# Altium PCB rNET_POE_Sensor_RevA1.PCBDOC (part 3 of 3)
Units mil, origin at the board's own origin, x right, y up, seen from the top; angles counter-clockwise.
Board outline 3750 x 2245 mil, 6 copper layers (TopLayer, Mid Layer 1, Mid Layer 2, Mid Layer 3, Mid Layer 4, BottomLayer), stack 60.4 mil thick; 269 components, 206 nets, 1048 pads, 579 vias.
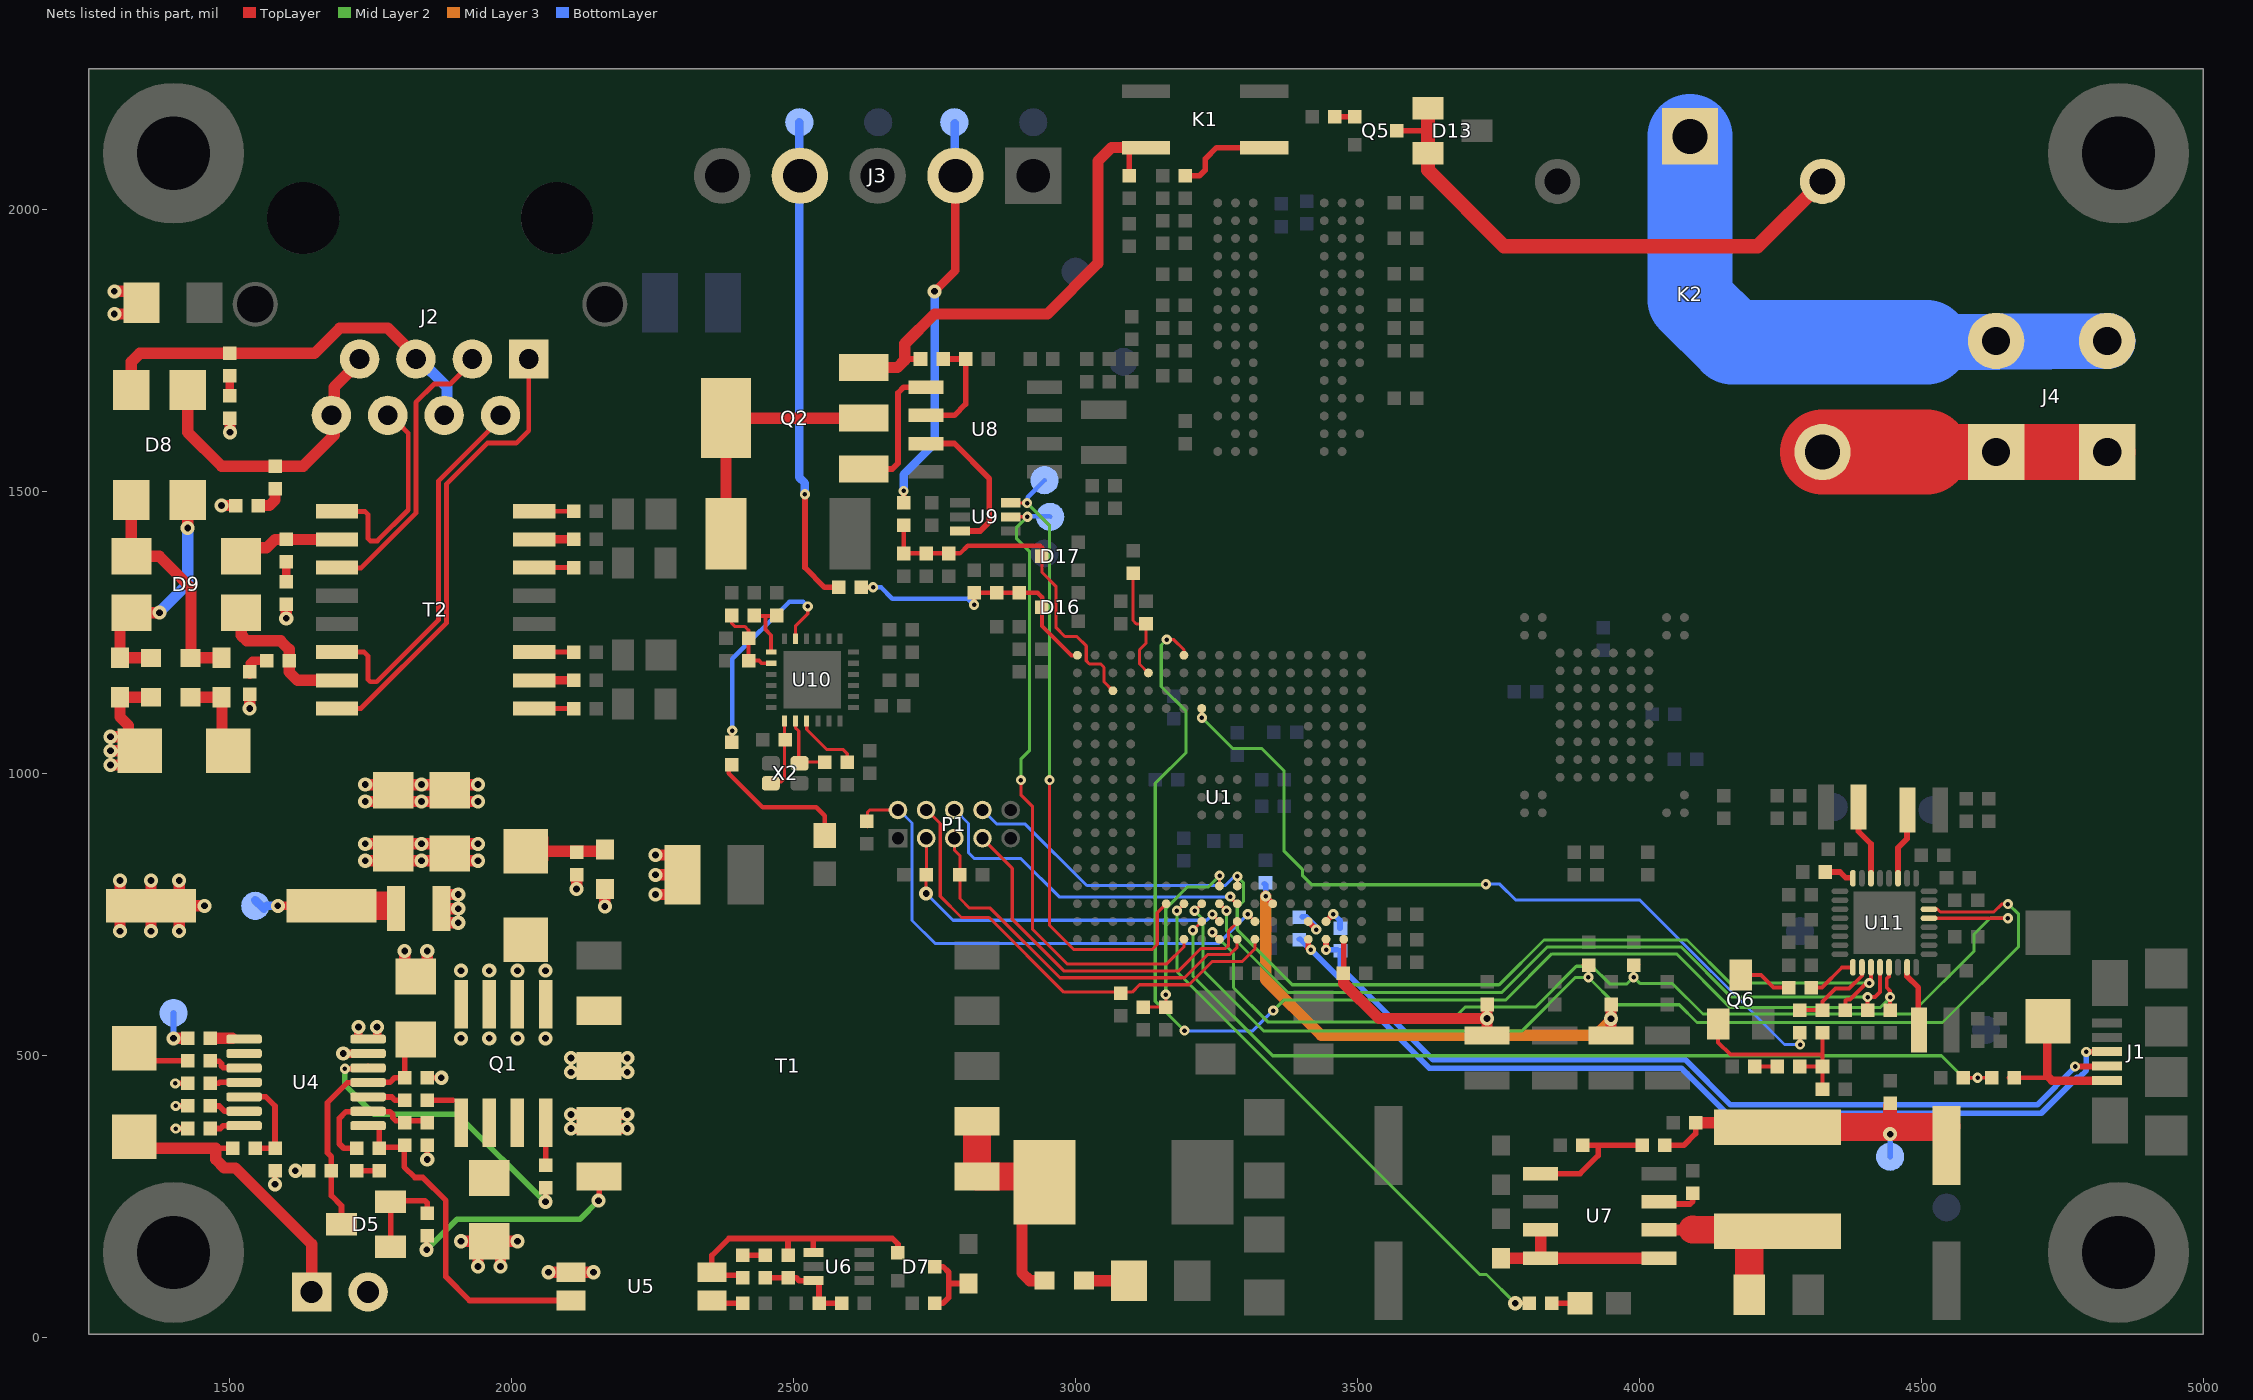
[diagram p7: the nets of this part, all layers, seen from the top]

## Via types
v1: diameter 25, hole 12, TopLayer to BottomLayer, 212 vias
v2: diameter 18, hole 8, TopLayer to BottomLayer, tented top, 187 vias
v3: diameter 18, hole 8, TopLayer to BottomLayer, 171 vias
v4: diameter 18, hole 8, TopLayer to BottomLayer, tented both sides, 7 vias
v5: diameter 25, hole 12, TopLayer to BottomLayer, tented top, 2 vias

## Nets (pads, with @x,y where several pads share a name; then routed paths per layer and width w, separated by ;. In a path a pad name is that pad's centre, name@x,y a point inside that pad or via, vN(x,y) a via of type N, cw(c..) or ccw(c..) an arc to the next point about the centre after c; other vN are vias at no path point) (continued)
NetC34_2: C34.2 C35.2 L4.1 U1.U16 | length 406.6
  TopLayer w10: C35.2@3475.74,644.74 U1.U16@3475.74,705.66
  TopLayer w20: C35.2@3475.8,643 3475.8,627.4 3538.2,565 v1(3730,565) ; L4.1@3730,540 v1(3730,565) ; C34.2@3730,590 v1(3730,565)
NetC36_2: C36.2 C37.2 L5.1 U1.R12 | length 910.1
  TopLayer w10: v2(3337.5,781.9) 3337.5,780.9 U1.R12@3349.75,768.65
  TopLayer w20: L5.1@3950,535 v1(3950,564.7) C36.2@3950,589.6
  Mid Layer 3 w20: v2@3337.3,781.8 3337.3,633.9 3435.6,535.6 3923.1,535.6 v1@3950.9,563.4
  BottomLayer w10: C37.2@3335.2,804.4 3337.4,802.2 3337.4,782 v2(3337.5,781.9)
NetC50_1: C50.1 D2.1 T1.9 T1.10 | length 362
  TopLayer w20: D2.1@2908,231 2905,228 2905,114 2919,100 C50.1@2930,100
  TopLayer w50: T1.9@2825,383 T1.10@2825,285 D2.1@2940,285
NetC50_2: C50.2 R18.1 | length 65
  TopLayer w20: C50.2@3015,100 R18.1@3080,100
NetC51_1: C51.1 D3.2 R19.1 | length 220.3
  TopLayer w20: D3.2@2025,855 D3.2@2032,862 ; D3.2@2025,862 D3.2@2032,862 ; D3.2@2055,847 D3.2@2055,862 ; R19.1@2164,860 2162,862 D3.2@2055,862 ; D3.2@2032,862 2055,885 D3.2@2055,862 ; D3.2@2032,862 D3.2@2055,862
NetC51_2: C51.2 C52.2 C53.2 L6.1 R19.2 T1.3 | length 548.6
  TopLayer w20: v1(1740,845) 1770,845 C53.2@1785,860 ; v1(1740,875) C53.2@1778,875 ; C53.2@1808,875 v1(1840,875) C52.2@1860,875 ; C53.2@1820,845 v1(1840,845) C52.2@1860,845 ; C52.2@1875,870 C52.2@1875,865 ; L6.1@1880,735 v1(1905,735) ; L6.1@1880,785 v1(1905,785) ; L6.1@1885,760 v1(1905,760) ; C52.2@1915,845 v1(1940,845) ; v1(1940,875) C52.2@1860,875 ; v1@2115,793 v1(2115,795) C51.2@2115,820 ; v1@2165,765 R19.2@2165,795 ; C52.2@1860,875 C52.2@1870,865 ; C52.2@1870,865 1865,860 C52.2@1875,860 ; C52.2@1870,865 C52.2@1875,860 ; C52.2@1870,865 C52.2@1875,865 ; C52.2@1875,860 1915,860 1910,865 C52.2@1875,865 ; C52.2@1875,860 C52.2@1875,865
  other v1: 2105,470 2205,470 2105,495 2205,495 2165,764
NetC55_2: C55.2 C75.2 L10.1 R43.1 R79.2 TP13.1 | length 511.3
  TopLayer w10: R43.1@4045,340 4079,340 4100,361 C55.2@4100,380
  TopLayer w20: C55.2@4100,380 L10.1@4153,380
  TopLayer w25: 4445,375 R79.2@4445,410
  TopLayer w50: L10.1@4245,372.5 4543.5,372.5 C75.2@4545,374
  BottomLayer w10: TP13.1@4445,320 v1(4445,360)
NetC58_2: C58.2 C59.2 C107.2 D5.3 U4.4 | length 448.2
  TopLayer w10: D5.3@1698,200 1698,233 1680,251 1680,320 1673,327 1673,416 1708,451 U4.4@1746,451 ; U4.4@1745,451.8 1783.8,451.8 1792,460 C58.2@1810,460 C59.2@1810,526
NetC60_1: C60.1 C69.1 R28.2 R40.1 U6.3 | length 174.1
  TopLayer w10: C69.1@2450,105 C60.1@2490,105 2505,105 2510,100 U6.3@2535,100 2540,100 2545,95 R28.2@2545,60 R40.1@2585,60
NetC60_2: C60.2 D7.1 R37.2 U5.2 U6.1 | length 506.6
  TopLayer w10: U5.2@2355,110 2410,110 R37.2@2410,105 ; U5.2@2355,115 2355,145 2385,175 2490,175 ; C60.2@2490,145 2490,175 ; U6.1@2535,150 2535,175 ; D7.1@2685,150 2685,165 2675,175 2535,175 ; 2490,175 2535,175
NetC61_1: C61.1 R33.2 | length 35
  TopLayer w15: R33.2@1600,1340 C61.1@1600,1375
NetC61_2: C61.2 D9.4 T2.10 | length 163.3
  TopLayer w20: D9.4@1520,1405 1525,1400 1565,1400 1580,1415 T2.10@1675,1415
NetC62_1: C62.1 R34.2 | length 52.1
  TopLayer w15: R34.2@1535,1175 R34.2@1535,1180 1535,1195 1540,1200 C62.1@1565,1200
NetC62_2: C62.2 D9.3 T2.15 | length 251.6
  TopLayer w20: D9.3@1520,1285 1520,1245 1530,1235 1590,1235 1605,1220 1605,1180 1620,1165 T2.15@1675,1165
NetC63_1: C63.1 R35.2 | length 35
  TopLayer w15: R35.2@1500,1670 C63.1@1500,1705
NetC63_2: C63.2 D8.4 J2.4 J2.5 | length 720.5
  TopLayer w20: D8.4@1325,1685 1325,1730 1340,1745 1650,1745 1695,1790 1780,1790 J2.5@1823,1747
  BottomLayer w20: J2.5@1835,1735 1885,1685 1885,1635 J2.4@1875,1625
NetC64_1: C64.1 R36.2 | length 54.1
  TopLayer w20: R36.2@1550,1475 1570,1475 1580,1485 C64.1@1580,1505
NetC64_2: C64.2 D8.3 J2.7 J2.8 | length 538.3
  TopLayer w20: D8.3@1425,1680 1425,1605 1485,1545 1630,1545 1685,1600 1685,1685 J2.7@1735,1735
NetC65_1: C65.1 C67.1 D6.1 L9.1 R32.2 TP15.1 U4.7 | length 361.8
  TopLayer w10: v2@1405,450 R32.2@1425,450
  TopLayer w15: U4.7@1728,532 v1(1728,550) ; U4.7@1761,531 v1(1761,550)
  TopLayer w20: v1(1288,1015) D6.1@1310,1015 ; v1(1288,1040) 1310,1040 D6.1@1315,1035 ; v1(1288,1065) 1308,1065 D6.1@1313,1060 ; L9.1@1304,1134 L9.1@1305,1135 C65.1@1360,1135 ; L9.1@1305,1134 1305,1100 1320,1085 D6.1@1320,1035 ; v1@1403,530 C67.1@1425,530
  BottomLayer w10: v1@1400,532 TP15.1@1400,575
  other v1: 1400,530
  other v2: 1403,450
NetC65_2: C65.2 C66.2 C67.2 D4.2 D6.2 L6.2 L8.1 R25.2 TP14.1 U4.8 U4.9 | length 532.4
  TopLayer w10: D4.2@1330,490 1424,490 R25.2@1425,489
  TopLayer w15: v1(1585,765) 1660,765 1665,760 C66.2@1680,775
  TopLayer w20: C65.2@1430,1135 1465,1135 ; C67.2@1465,530 U4.8@1504,530 ; D6.2@1486,1060 L8.1@1486,1134 ; 1465,1135 1484.95,1134.05 L8.1@1486,1134 ; 1465,1135 L8.1@1485,1135 L8.1@1486,1134
  TopLayer w50: C66.2@1689,765 L6.2@1784,765
  BottomLayer w15: TP14.1@1545,775 1560,760 1565,765 v1(1585,765)
NetC68_1: C68.1 D8.2 D9.2 L9.2 | length 413.4
  TopLayer w20: C68.1@1361,1205 C68.1@1360,1205 L9.2@1305,1205 1305,1265 D9.2@1325,1285 1325,1286 1326,1285 v1(1375,1285) ; v1(1425,1435) D8.2@1425,1480
  BottomLayer w20: v1@1377,1285 v1(1375,1285) 1375,1286 1425,1336 v1(1425,1435)
NetC68_2: C68.2 D8.1 D9.1 L8.2 | length 409
  TopLayer w20: D9.1@1325,1385 D8.1@1325,1485 ; D9.1@1326,1386 1327,1385 1375,1385 1431,1329 C68.2@1431,1205 ; C68.2@1430,1205 C68.2@1431,1205 ; C68.2@1430,1206 C68.2@1431,1205 ; L8.2@1485,1205 C68.2@1431,1205
NetC69_2: C69.2 R37.1 | length 40
  TopLayer w10: R37.1@2410,145 C69.2@2450,145
NetC70_1: C70.1 R39.1 | length 41
  TopLayer w10: R39.1@1724,295 R39.1@1725,295 C70.1@1765,295
NetC70_2: C70.2 R38.1 U4.1 U5.4 | length 619.5
  TopLayer w10: U4.1@1745,375 1764,375 U4.1@1766,373 ; C70.2@1765,335 U4.1@1765,373 ; C70.2@1766,338 1767,337 R38.1@1809,337 ; R38.1@1809,341 R38.1@1809,337 ; R38.1@1810,340 1810,337 R38.1@1809,337 ; U5.4@2105,65 1925,65 1883,107 1883,242 1842,283 1828,283 1809,302 R38.1@1809,337
NetC71_2: C71.2 R38.2 R39.2 U4.2 | length 250.4
  TopLayer w10: R39.2@1725,335 1702,335 1694,343 1694,388 1706,400 1784,400 1789,395 1789,389 1794,384 C71.2@1850,384
NetC72_2: C72.2 D7.3 R26.2 | length 138.3
  TopLayer w10: R26.2@2750,60 2765,60 2775,70 2775,95 ; D7.3@2750,125 2765,125 2775,115 2775,95 ; C72.2@2810,95 2775,95
NetC73_2: C73.2 R33.1 R34.1 R35.1 R36.1 | length 170
  TopLayer w20: v1(1295,1815) C73.2@1340,1815 ; v1(1295,1855) C73.2@1335,1855 ; v1(1485,1475) R36.1@1510,1475 ; v1(1500,1605) R35.1@1500,1625 ; v1(1535,1115) R34.1@1535,1130 ; v1(1600,1275) R33.1@1600,1300
NetC76_2: C76.2 U7.3 | length 67.7
  TopLayer w10: U7.3@4035,240 4039,236 4090,236 4095,241 C76.2@4095,245
NetC78_2: C78.2 C109.2 U10.1 | length 106
  TopLayer w7: C78.2@2430,1276 2433,1279 2466,1279 C109.2@2470,1275 ; 2450,1274 2450,1255 2460,1245 U10.1@2460,1215
NetC82_2: C82.2 T2.7 | length 69
  TopLayer w15: T2.7@2045,1415 C82.2@2114,1415
NetC85_2: C85.2 U11.32 | length 52.1
  TopLayer w10: C85.2@4330,825 4356,825 4366,815 U11.32@4378,815
NetC86_2: C86.2 C110.2 L15.1 U10.2 | length 146.1
  TopLayer w5.5: L15.1@2385,1275 2390,1270 2390,1266.1 2395.4,1260.7 2413.1,1260.7 2420,1253.8 ; C86.2@2420,1197 C86.2@2423.1,1200.1
  TopLayer w7: C86.2@2420,1197 2420,1253.8 ; C86.2@2423.1,1200.1 2438.5,1200.1 2443.3,1195.3 U10.2@2460,1195.3
NetC94_2: C94.2 U10.7 X2.1 | length 142.2
  TopLayer w5.5: X2.1@2449.4,982.3 2452.1,985 2478,985 2484,991 U10.7@2484,1095
NetC95_2: C95.2 U10.8 X2.3 | length 127.8
  TopLayer w5.5: U10.8@2503,1098 2503,1081 2509,1075 2509,1028 2501,1020 C95.2@2545,1020
NetC102_1: C102.1 C103.1 C104.2 Q6.1 R70.1 | length 365.4
  TopLayer w7: Q6.1@4140,555 4140,522.6 4161.7,500.9 4324,500.9 ; C103.1@4285,480 R70.1@4325,480 ; C104.2@4325,440 R70.1@4325,480 ; C102.1@4325,540 R70.1@4325,480
NetC102_2: C102.2 R65.1 U11.10 | length 159.1
  TopLayer w7: R65.1@4285,580 C102.2@4325,580 4325,595 4348,618 4372,618 4395,641 U11.10@4395,656
NetC103_2: C103.2 R64.2 | length 38.7
  TopLayer w7: R64.2@4206.3,480 C103.2@4245,480
NetC108_2: C108.2 T2.2 | length 70
  TopLayer w15: T2.2@2035,1165 T2.2@2040,1165 C108.2@2105,1165
NetD1_1: D1.1 R14.2 | length 50
  TopLayer w10: R14.2@3845,60 D1.1@3895,60
NetD3_1: D3.1 Q1.5 Q1.6 Q1.7 Q1.8 T1.4 | length 5
  TopLayer w20: D3.1@2025,705 D3.1@2025,710
  other v1: 1910,530 1960,530 2010,530 2060,530 1910,650 1960,650 2010,650 2060,650
NetD4_1: D4.1 P2.1 R20.1 | length 527.1
  TopLayer w10: 1475,335 R20.1@1505,335
  TopLayer w20: D4.1@1330,350 1330,335 1475,335 1475,315 1490,300 1510,300 1645,165 P2.1@1645,80
NetD5_1: D5.1 D5.2 R23.2 | length 162.5
  TopLayer w10: D5.1@1787,160 1785,162 D5.2@1785,240 1785,242 1846,242 1850,238 R23.2@1850,225
NetD10_2: D10.2 L10.2 U7.2 | length 315
  TopLayer w20: U7.2@4035,190 4095,190
  TopLayer w50: 4095,191 L10.2@4240,190 ; D10.2@4195,75 L10.2@4195,185
NetD11_1: D11.1 R45.2 | length 246.2
  TopLayer w8: R45.2@2385,1015 2385,999.8 2444.8,940 2540,940 2555,925 D11.1@2555,895
NetD12_1: D12.1 J1.1 R6.2 | length 274.3
  TopLayer w8: R6.2@4655,460 R6.2@4665,460 4723,460
  TopLayer w15: D12.1@4724,560 4724,463 4732,455 J1.1@4830,455
NetD13_1: D13.1 D13.2 K2.2 Q5.3 | length 968.4
  TopLayer w10: Q5.3@3570,2140 3625,2140
  TopLayer w25: D13.2@3625,2100 3625,2070 3760,1935 4210,1935 K2.2@4325,2050 ; D13.1@3625,2180 3625,2140 3625,2110 D13.2@3626.62,2100.27
NetJ1_2: J1.2 R80.1 U1.U15 | length 1556.6
  TopLayer w10: U1.U15@3444.25,705.66 3444.25,687.45 v2(3444.5,687.2) ; v2(4773,480) 4825,480 4826,481 J1.2@4828,479
  BottomLayer w10: v2(3444.5,687.2) R80.1@3464.2,687.2 ; R80.1@3470,685.2 R80.1@3470,685 3469.8,679.9 3469.8,656.2 3634,492 4082,492 4162,412 4706,412 4773,479 v2(4773,480)
NetJ1_3: J1.3 R7.1 U1.U14 | length 1652
  TopLayer w10: v2@3412.4,690 v2@3412.7,689.7 ; U1.U14@3412.7,705 v2@3412.7,689.7 ; v2(3417.6,687.1) 3415.3,687.1 v2@3412.7,689.7 ; v2(4793,506) 4826.2,506 4828.2,508 J1.3@4830,506.2
  BottomLayer w10: R7.1@3397.4,705.9 3398.4,705.9 3417.2,687.1 v2(3417.6,687.1) 3627.7,477 4075,477 4155,397 4713,397 4777,461 4781,461 4793,473 v2(4793,506) 4793.82,506 v2@4795.82,508
NetJ2_1: J2.1 T2.16 | length 826.2
  TopLayer w8.6: T2.16@1676.5,1115 1732.3,1115 1883.9,1266.6 1883.9,1513.2 1956.5,1585.8 2007.8,1585.8 2030,1608 J2.1@2030,1732
NetJ2_2: J2.2 T2.14 | length 694.9
  TopLayer w8.6: T2.14@1675,1215.1 1738,1215.1 1744.7,1208.4 1744.7,1166.7 1749,1162.4 1760.4,1162.4 1870.3,1272.3 1870.3,1518.9 J2.2@1984.3,1632.9
NetJ2_3: J2.3 T2.11 | length 528.6
  TopLayer w8.6: T2.11@1675,1364.4 1732.9,1364.4 1830,1461.5 1830,1658 1862.6,1690.6 1890.6,1690.6 J2.3@1935,1735
NetJ2_6: J2.6 T2.9 | length 371.3
  TopLayer w8.6: T2.9@1674.2,1464.8 1739.4,1464.8 1744.7,1459.5 1744.7,1416.8 1749.2,1412.3 1761.5,1412.3 1816.4,1467.2 1816.4,1603.6 J2.6@1800,1620
NetJ4_1: J4.1 J4.3 K2.4 | length 505
  TopLayer w100: 4510,1570 J4.3@4633,1570 J4.1@4830,1570
  TopLayer w150: K2.4@4325,1570 4510,1570
NetJ4_2: J4.2 J4.4 K2.1 | length 1051.1
  BottomLayer w100: 4520,1765 4633.01,1765.73 J4.2@4830,1767
  BottomLayer w150: K2.1@4090,2130 4090,1840 4165,1765 4510,1765
NetK1_1: K1.1 R51.1 | length 137.4
  TopLayer w10: R51.1@3195,2060 3220,2060 3230,2070 3230,2090 3250,2110 K1.1@3300,2110
NetK1_4: K1.4 Q2.3 R47.2 R48.2 | length 829.6
  TopLayer w10: 2698,1735 R47.2@2725,1735 ; K1.4@3090,2110 3095,2110 R48.2@3095,2061
  TopLayer w20: Q2.3@2624,1720 2684,1720 2697,1733 2697,1762 2750,1815 2950,1815 3040,1905 3040,2086 3064,2110 K1.4@3088,2110
NetL12_2: L12.2 U11.27 | length 125.6
  TopLayer w10: U11.27@4459,814 4459,868 4475,884 L12.2@4475,933
NetL13_1: L13.1 U11.30 | length 125.1
  TopLayer w10: L13.1@4389,930 4389,897 4411,875 U11.30@4411,814
NetL14_2: L14.2 U11.15 | length 120.3
  TopLayer w10: U11.15@4475,656 4475,640 4495,620 L14.2@4495,544
NetQ1_1: Q1.1 Q1.2 Q1.3 R30.1 R31.2 | length 45
  TopLayer w10: R30.1@1850,420 1895,420
NetQ1_4: Q1.4 R27.1 | length 75
  TopLayer w10: R27.1@2060,305 Q1.4@2060,380
NetQ2_1: Q2.1 U8.1 | length 244.3
  TopLayer w10: Q2.1@2624,1540 2675,1540 2685,1550 2685,1675 2695,1685 U8.1@2735,1685
NetQ2_2: Q2.2 Q2.4 R42.2 | length 449.4
  TopLayer w20: R42.2@2380,1425 Q2.4@2380,1630 2623,1630 Q2.2@2624,1629
NetQ5_1: Q5.1 R63.1 | length 25
  TopLayer w10: R63.1@3460,2165 Q5.1@3485,2165
NetQ6_3: Q6.3 R66.2 | length 93.9
  TopLayer w7: Q6.3@4180,642 4216.1,642 4238.1,620 R66.2@4264.8,620
NetR7_2: R7.2 U1.T14 | length 57
  TopLayer w10: U1.T14@3412.75,737.16 3426.91,723 v4(3427,723)
  BottomLayer w10: R7.2@3402.1,745.4 3409.2,745.4 3427,727.6 v4(3427,723)
NetR14_1: R14.1 U1.R7 | length 994.5
  TopLayer w5.5: v2(3179.8,756.2) U1.R7@3192.28,768.65 ; v1(3780,60) R14.1@3805,60
  Mid Layer 2 w5.5: v2(3179.8,756.2) 3179.8,648.9 3180,648.7 3180,648 3717,111 3729,111 v1(3780,60)
NetR20_2: R20.2 R21.1 U4.12 | length 186.6
  TopLayer w10: U4.12@1525,426.2 1563.8,426.2 1580,410 1580,342 1587,335 R20.2@1545,335 R20.2@1540,335
NetR22_1: R22.1 U4.14 | length 67.1
  TopLayer w10: R22.1@1460,370 R22.1@1465,370 1483,370 1488,375 U4.14@1525,375
NetR23_1: R23.1 T1.1 | length 414.9
  TopLayer w10: v1(1849,155) 1849,179 R23.1@1850,180 R23.1@1850,185 ; v1(2154,242) 2155,243 T1.1@2155,285
  Mid Layer 2 w10: v1(1849,155) 1903,209 2121,209 v1(2154,242)
NetR24_1: R24.1 U4.13 | length 69.9
  TopLayer w10: R24.1@1459,410 R24.1@1465,410 1481,410 1490.4,400.6 U4.13@1525,400.6
NetR25_1: R25.1 U4.10 | length 68.3
  TopLayer w10: R25.1@1465,490 1466,489 1481,489 1485,485 1485,481 1488,478 U4.10@1526,478
NetR27_2: R27.2 U4.5 | length 528.4
  TopLayer w10: v4(1704,476) 1741,476 U4.5@1745,480 ; v1(2060,240) R27.2@2060,255
  Mid Layer 2 w10: v4(1704,476) 1704,447 1756,395 1904,395 2059,240 v1(2060,240)
NetR29_2: R29.2 U5.1 | length 50
  TopLayer w10: U5.1@2360,60 R29.2@2410,60
NetR30_2: R30.2 U4.3 | length 67.5
  TopLayer w10: U4.3@1745,426 1787,426 1793,420 R30.2@1810,420
NetR32_1: R32.1 U4.11 | length 65.7
  TopLayer w10: R32.1@1460,450 R32.1@1465,450 1480,450 1481.8,451.8 U4.11@1525,451.8
NetR41_2: R41.2 U7.1 U7.7 U7.8 | length 318.3
  TopLayer w20: R41.2@3755,148 3763,140 U7.8@3805,140 ; U7.7@3825,190 U7.8@3825,140 U7.1@4035,140 U7.1@4040,140
NetR43_2: R43.2 R46.1 U7.5 | length 236.3
  TopLayer w10: U7.5@3825,290 3895,290 3927,322 3927,339 ; R46.1@3901,340 R43.2@4005,340
NetR44_1: R44.1 R47.1 U8.2 | length 198.3
  TopLayer w10: U8.2@2735,1635 2785,1635 2805,1655 R44.1@2805,1735 R47.1@2765,1735
NetR45_1: R45.1 U10.23 | length 388.3
  TopLayer w5.5: U10.23@2503,1238 2503,1261 2525,1283 v2(2525,1296)
  TopLayer w8: R45.1@2390.6,1061 v3@2390.6,1076
  BottomLayer w8: v3(2391,1076) 2391,1203 2492,1304 2517,1304 v2(2525,1296)
NetR58_1: R58.1 U10.9 | length 118.5
  TopLayer w5.5: U10.9@2523.15,1092.75 2523.15,1077.85 2559,1042 2588,1042 2595,1035 R58.1@2595,1021
NetR66_1: R66.1 U11.9 | length 88.9
  TopLayer w7: R66.1@4305,620 4324,620 4360,656 U11.9@4379,656
NetR71_2: R71.2 R72.2 U1.P9 | length 355.1
  TopLayer w5.5: R71.2@3120.3,591.3 3126,585.6 3160.3,585.6 3160.3,607.4 v3(3160,607.7) ; U1.P9@3255.27,800.15 3255.5,800.38 v2(3255.5,818.5)
  Mid Layer 2 w5.5: v3(3160,607.7) 3160,760.09 3198.31,798.4 3235.4,798.4 v2(3255.5,818.5)
NetR75_2: R75.2 T2.1 | length 67
  TopLayer w7.5: T2.1@2038,1115 T2.1@2040,1115
  TopLayer w8.6: T2.1@2040,1115 R75.2@2105,1115
NetR76_2: R76.2 T2.3 | length 69
  TopLayer w7.5: T2.3@2036,1215 T2.3@2040,1215
  TopLayer w8.6: T2.3@2040,1215 R76.2@2105,1215
NetR77_2: R77.2 T2.6 | length 70
  TopLayer w8.6: T2.6@2040,1365 R77.2@2110,1365
NetR78_2: R78.2 T2.8 | length 70
  TopLayer w8.6: T2.8@2040,1465 R78.2@2110,1465
NetR80_2: R80.2 U1.T15 | length 49
  TopLayer w10: U1.T15@3444.25,737.16 3457.1,750.01 v2(3457.1,750.4)
  BottomLayer w10: v2(3457.1,750.4) 3457.6,750.4 3469.1,738.9 R80.2@3469.1,725.2
NetU8_3: U8.3 U9.6 | length 273.3
  TopLayer w10: U8.3@2735,1585 2785,1585 2847,1523 2847,1446 2831,1430 U9.6@2795,1430
NRST: P1.8 R69.1 U1.P10 U11.11 | length 1959.7
  TopLayer w5.5: U1.P10@3286.76,800.15 3287,800.39 v2(3287,817.1)
  TopLayer w7: R69.1@4366,580 4366,597 4368,599 4374,599 4403,628 v3(4408,628) 4411,631 U11.11@4411,656
  Mid Layer 2 w5.5: v2(3287,817.1) 3298,806.1 3298,772.6 3286.8,761.4 3286.8,722.7 3384.5,625 3751.4,625 3830.9,704.5 4084.8,704.5 4161.4,627.9 ; 4161.8,628 v3(4408,628)
  BottomLayer w5.5: P1.8@2836,934.5 2860.2,910.3 ; 2861,910 2911,910 3020,801 3265.7,801 3281.8,817.1 v2(3287,817.1)
NTRST: P1.2 R10.2 U1.T11 | length 941.1
  TopLayer w5.5: R10.2@2631,905 2631,931 2635,935 P1.2@2687,935 ; v2(3305.6,750) 3305.6,749.82 U1.T11@3318.26,737.16
  BottomLayer w5.5: P1.2@2687,935 2710,912 2710,739 2750.6,698.4 3254,698.4 v2(3305.6,750)
PGND: C49.2 C52.1 C53.1 C58.1 C59.1 C66.1 C71.1 C107.1 P2.2 R21.2 R22.2 R24.2 R31.1 T1.2 U4.6 U5.3 | length 1535.3
  TopLayer w10: v2@1399,370 v2(1404,370) R22.2@1420,370 ; v2(1404,410) R24.2@1420,410 ; v1(1580,271) R21.2@1580,285 ; v1(1616,295) C107.1@1640,295 C107.1@1641,295 ; v1@1850,316 C71.1@1850,340 ; C58.1@1850,460 v1(1875,460)
  TopLayer w15: v1@1702,503 U4.6@1745,503
  TopLayer w20: v1(1305,720) v1(1305,810) ; v1(1360,720) C66.1@1360,765 v1(1360,810) ; v1(1410,720) v1(1410,810) ; 1440,765 v1(1455,765) ; v1(1740,950) v1(1840,950) v1(1940,950) ; v1(1740,980) v1(1840,980) v1(1940,980) ; C59.1@1810,660 v1(1810,685) ; C59.1@1840,645 1855,660 1850,665 v1(1850,685) ; v1(1910,170) R31.1@1960,170 v1(2010,170) ; v1(1940,125) R31.1@1940,159 ; v1(1980,125) R31.1@1980,167 ; v1@2066,115 v1(2145,115) ; v1(2105,370) v1(2205,370) ; v1(2105,395) v1(2205,395) ; v1(2255,785) C49.2@2307,785 ; v1(2255,820) C49.2@2303,820 C49.2@2305,820 ; v1(2255,855) C49.2@2307,855
  other v1: 2065,115 1850,315 1701,503
PMIC_NIRQ: R67.1 U1.R9 U11.12 | length 1401.3
  TopLayer w5.5: U1.R9@3255.27,768.65 3254.75,768.65 3267.1,756.3 v2(3267.8,756.3) ; R67.1@4405,579 R67.1@4405,580
  TopLayer w7: R67.1@4405,580 v3(4405,603) 4418,603 4427,612 U11.12@4427,656
  Mid Layer 2 w5.5: v2(3267.8,756.3) 3267.8,720.4 3377,611.2 3756.1,611.2 3837.2,692.3 4074,692.3 4163.3,603 v3(4405,603)
PMIC_WKUP: R68.1 U1.A7 U11.13 | length 2245.8
  TopLayer w5.5: v2(3161.7,1237.2) 3174.2,1237.2 3192.28,1219.12 U1.A7@3192.28,1209.6
  TopLayer w7: U11.13@4443,656 4443,640 4439,636 4439,620 4445,614 v3(4445,603) R68.1@4445,580
  Mid Layer 2 w5.5: v2(3161.7,1237.2) 3152.1,1227.6 3152.1,1154 3196.1,1110 3196.1,1036.9 3141.4,982.2 3141.4,595.6 v3(3193.3,543.7) ; v3@3350.7,578.8 v3@3351,579.1 ; v3(3350.7,579.1) v3@3351,579.1 ; v3@3352.3,579.1 v3@3351,579.1 ; v3(4445,603) 4445,602 4428,585 4160.7,585 4065.9,679.8 3845,679.8 3763.5,598.3 3370.2,598.3 v3@3351,579.1
  BottomLayer w5.5: v3@3193.6,542.7 3313.6,542.7 3350.7,579.8 v3(3350.7,579.1)
RTCK: P1.6 U1.R10 | length 600.7
  TopLayer w5.5: v2(3274.5,781.5) 3274.5,780.4 3286.25,768.65 U1.R10@3286.76,768.65
  BottomLayer w5.5: P1.6@2786.4,934.6 2810,911 2810,859.2 2820.2,849 ; 2820,849 2820.2,849 ; v2(3274.5,781.5) 3274.4,781.5 3273.9,781 2971,781 2903,849 2820.2,849
SCL_PMIC: R52.2 U1.U9 U11.21 | length 1872.5
  TopLayer w5.5: v2(3242.8,718.2) 3242.8,718.13 U1.U9@3255.27,705.66 ; v3(3990,638.4) 3990,651.2 R52.2@3999.4,660.6 ; U11.21@4514,743 v3(4654,743) v3@4655,743
  Mid Layer 2 w5.5: v2(3242.8,718.2) 3280.3,680.7 3280.3,619.9 3341,559.2 3664.65,559.2 3690.75,585.3 3816,585.3 3888.5,657.8 3916.2,657.8 3947.5,626.5 3978.1,626.5 v3(3990,638.4) v3@3990,637.1 ; v3@3989.7,637.1 v3@3990,637.1 ; v3@3990,636.9 v3@3990,637.1 ; v3(4654,743) 4622,743 4594,715 4594,685 4482,573 4113,573 4059,627 4002,627 3991.9,637.1 v3@3990,637.1
SCLK: TP7.1 U1.U7 U9.2 | length 1138.8
  TopLayer w5.5: U9.2@2900.7,1453.9 2901.9,1455.1 v3(2914.7,1455.1) ; v3(2903,988) 2903,962 2924,941 2924,723.1 2985,662.1 3161.9,662.1 3192.28,692.48 U1.U7@3192.28,705.66
  Mid Layer 2 w5.5: v3(2903,988) 2903,1025 2918,1040 2918,1394 2895,1417 2895,1435.4 v3(2914.7,1455.1)
  BottomLayer w8: v3@2915,1456 2954,1456 TP7.1@2955,1455
SDA_PMIC: R53.2 U1.R8 U11.22 | length 2004.2
  TopLayer w5.5: v2(3211.1,756.2) 3211.32,756.2 U1.R8@3223.77,768.65 ; R53.2@3899.9,660.6 3909.9,650.6 v3(3909.9,638.4) ; U11.22@4516,759 4529,759 4534,754 4629,754 4643,768 v3(4654,768)
  Mid Layer 2 w5.5: v2@3211.4,755.7 3226,741.1 3226,650.9 3334.2,542.7 3791.4,542.7 3886.9,638.2 3900.1,638.2 ; 3900.6,637.9 3910,637.9 3958.3,589.6 4070.9,589.6 4102.5,558 4538,558 4673,693 4673,750 4655,768 v3(4654,768)
SDO: TP8.1 U1.R6 U9.3 | length 1139.7
  TopLayer w5.5: U9.3@2885.6,1480.8 2887.1,1479.3 v3(2914.2,1479.3) ; v3(2954,988) 2954,730.1 2996.7,687.4 3136.1,687.4 3145,696.3 3145,752.87 U1.R6@3160.78,768.65 U1.R6@3160.78,768.65
  Mid Layer 2 w5.5: v3(2914.2,1479.3) 2954,1439.5 v3(2954,988)
  BottomLayer w8: v3@2915,1479 2915,1490 TP8.1@2945,1520
SENSOR_DRY: C96.2 D16.3 R57.2 R60.1 R61.2 U1.A1 | length 493.4
  TopLayer w7: D16.3@2940.6,1294 2940.6,1261.4 2993,1209 3001.8,1209 3002.4,1209.6 U1.A1@3003.3,1209.6
  TopLayer w8: R57.2@2620,1330 v3(2641,1330) ; v3(2820,1299) R60.1@2820,1319 ; R60.1@2820,1320 C96.2@2900,1320 2933,1320 2941,1312 D16.3@2941,1293
  BottomLayer w8: v3(2641,1330) 2655,1330 2675,1310 2809,1310 v3(2820,1299)
SENSOR_IN_DRY: J3.4 R57.1 TP21.1 | length 870.7
  TopLayer w10: v3(2520,1495) 2520,1365 2555,1330 2575,1330 R57.1@2580,1325
  BottomLayer w15: TP21.1@2510,2155 2510,1525 2520,1515 v3(2520,1495)
SENSOR_IN_WET: J3.2 R83.1 TP9.1 | length 705.4
  TopLayer w10: R83.1@2695,1480 v3(2695,1501)
  TopLayer w15: v1(2750,1855) 2787,1892 J3.2@2787,2060
  BottomLayer w10: v3@2695,1500 v3(2695,1501)
  BottomLayer w15: v3(2695,1501) 2695,1530 2750,1585 2750,1852 v1@2747,1855 ; J3.2@2786,2068 TP9.1@2786,2153
SENSOR_WET: C106.2 D17.3 R73.1 R74.2 R83.2 U1.C3 | length 634.3
  TopLayer w5.5: D17.3@2940.8,1384.9 2940.8,1356.3 2965,1332.1 2965,1259 2981.1,1242.9 3002.2,1242.9 3019,1226.1 3019,1199.5 3024.6,1193.9 3044.8,1193.9 3050.6,1188.1 3050.6,1162.5 3066.29,1146.81 U1.C3@3066.29,1146.61
  TopLayer w8: R83.2@2695,1440 2695,1391 2696,1390 2795,1390 2809,1404 2937,1404 2941,1400 D17.3@2941,1383
SHDN: R65.2 U1.D8 | length 1427.5
  TopLayer w5.5: U1.D8@3223.77,1115.11 3223.77,1099.13 v2(3224.2,1098.7) ; R65.2@4285,537 R65.2@4285.7,537.7
  TopLayer w7: R65.2@4285,537 4285.3,536.7 v3(4285.3,518.9)
  Mid Layer 2 w5.5: v2(3224.2,1098.7) 3278.9,1044 3330.3,1044 3370,1004.3 3370,861.9 3402.3,829.6 3402.3,819.11 3419.06,802.35 3726.85,802.35 v3(3727.9,803.4)
  BottomLayer w5.5: v3(3727.9,803.4) 3752.8,803.4 3781.2,775 4001.4,775 4257.5,518.9 v3(4285.3,518.9)
TCK: P1.5 R82.1 U1.U10 | length 697.7
  TopLayer w5.5: P1.5@2785.3,885.1 2785.3,863.6 2795,853.9 2795,778 2812,761 2848.8,761 2972.4,637.4 3193.2,637.4 3234.4,678.6 3273.8,678.6 3286.77,691.57 U1.U10@3286.77,705.66
TDI: P1.3 R8.1 U1.T9 | length 659.7
  TopLayer w5.5: v1@2731.8,787 v1(2735,787) R8.1@2735,815.6 ; R8.1@2735,820 R8.1@2735,815.6 ; P1.3@2735.5,884.6 2735.5,825.3 2730.4,820.2 R8.1@2735,815.6 ; R8.1@2735.7,814.9 R8.1@2735,815.6 ; v2(3242.9,749.7) 3242.9,749.6 3255.27,737.23 U1.T9@3255.27,737.16
  BottomLayer w5.5: v1(2735,787) 2782.55,739.45 3232.65,739.45 v2(3242.9,749.7)
TDO: P1.7 U1.T10 | length 655
  TopLayer w5.5: P1.7@2836.1,885.9 2836.1,882.9 2887.5,831.5 ; 2887.7,831 2887.7,741 2979,649.7 3182.8,649.7 3222.4,689.3 3266.1,689.3 ; 3265.9,689.1 3266.1,689.3 ; U1.T10@3286.76,737.16 3286.76,735.44 3271,719.67 3271,694.2 3266.1,689.3
TMS: P1.4 R9.1 U1.U11 | length 840.8
  TopLayer w5.5: P1.4@2735.7,935.3 2760,911 2760,782 2797.7,744.3 2846.7,744.3 2979.2,611.8 3100.4,611.8 3113.6,625 3201.2,625 3242.1,665.9 3295.2,665.9 3318.26,688.96 U1.U11@3318.26,705.66
VDDBU: C105.2 R15.2 U1.B5 | length 207.3
  TopLayer w5.5: R15.2@3102,1355 3102,1271 3108,1265 C105.2@3125,1265 ; C105.2@3124.7,1264.7 3124.7,1230.2 3113.5,1219 3113.5,1193.89 U1.B5@3129.28,1178.1
VUSB: R4.1 R6.1 U1.T8 | length 1609.8
  TopLayer w5.5: v2(3208.2,721.7) 3208.4,721.7 U1.T8@3223.77,737.16 U1.T8@3223.77,737.16 ; R4.1@4575,460 v3(4600,460) R6.1@4615,460
  Mid Layer 2 w5.5: v2(3208.2,721.7) 3208.2,640.5 3349.7,499 4536,499 4575,460 v3(4600,460)
pads on no net: J1.4 J1.6 J1.7 J1.8 J1.9 J1.10 J1.11 J2.9 J2.10 T1.5 T1.6 T2.4 T2.5 T2.12 T2.13 TP18.1 TP19.1 TP20.1 U1.A3 U1.A5 U1.A6 U1.A8 U1.B9 U1.C7 U1.C9 U1.D7 U1.D9 U1.D16 U1.D17 U1.E1 U1.E2 U1.E14 U1.E15 U1.F1 U1.F2 U1.F3 U1.F4 U1.G1 U1.G2 U1.G3 U1.G4 U1.H1 U1.H2 U1.H3 U1.H16 U1.J1 U1.J2 U1.J3 U1.J4 U1.J15 U1.J16 U1.J17 U1.K1 U1.K2 U1.K3 U1.K4 U1.K16 U1.K17 U1.L1 U1.L2 U1.L3 U1.L4 U1.L14 U1.L15 U1.L16 U1.L17 U1.M1 U1.M2 U1.M3 U1.M16 U1.M17 U1.N1 U1.N2 U1.N3 U1.N4 U1.P1 U1.P2 U1.P3 U1.P4 U1.P5 U1.P11 U1.P16 U1.P17 U1.R1 U1.R2 U1.R3 U1.R4 U1.R5 U1.R11 U1.R16 U1.R17 U1.T1 U1.T2 U1.T3 U1.T4 U1.T5 U1.T6 U1.U1 U1.U2 U1.U3 U1.U4 U1.U5 U1.U6 U1.U8 U2.A1 U2.A2 U2.A9 U2.A10 U2.B1 U2.B9 U2.B10 U2.D6 U2.D7 U2.D8 U2.E3 U2.E4 U2.E5 U2.E6 U2.E7 U2.E8 U2.F3 U2.F4 U2.F5 U2.F6 U2.F8 U2.G3 U2.G5 U2.G6 U2.G7 U2.G8 U2.H3 U2.H5 U2.H6 U2.H7 U2.J3 U2.J5 U2.L1 U2.L2 U2.L9 U2.L10 U2.M1 U2.M2 U2.M9 U2.M10 U3.A2 U3.A8 U3.E2 U3.E8 U3.L1 U3.R3 U3.R7 U3.R8 U6.2 U6.4 U6.5 U8.7 U11.3 U11.7 U11.8 U11.18 U11.25 X1.2 X1.4 X2.2 X2.4

## Polygon pours and split planes (outlines as drawn)
NetC55_2 on TopLayer "C55_2" (solid, pour order 50): 4130,400 4130,280 4140,270 4560,270 4570,280 4570,400 4560,410 4140,410
NetR41_2 on TopLayer "R41_2" (solid, pour order 48): 4005,120 4040,120 4045,125 4045,155 4040,160 3995,160 3945,210 3890,210 3875,210 3835,210 3810,210 3805,205 3805,190 3805,165 3805,125 3810,120 3895,120 3905,120 3915,120 3930,120
CHASSIS on TopLayer "Chassis" (solid, pour order 10): 1285,2225 1275,2215 1275,2185 1275,1930 1285,1920 1315,1920 1420,1920 1440,1920 1440,1880 1440,1790 1450,1780 1625,1780 1675,1830 2185,1830 2195,1840 2195,2180 2195,2215 2185,2225
NetQ1_1 on TopLayer "Q1_1" (solid, pour order 4): 1880,435 1890,445 2020,445 2030,435 2030,275 2005,250 1905,250 1880,275
NetD3_1 on TopLayer "D3_1" (solid, pour order 2): 2200,525 2210,535 2210,610 2085,735 1965,735 1885,655 1885,500 1895,490 2065,490 2100,525
NetC65_2 on TopLayer "C65_2" (solid, pour order 14): 1285,680 1285,470 1295,460 1330,460 1365,460 1375,470 1375,559 1460,559 1490,559 1490,500 1495,495 1660,495 1665,500 1665,566 1704.5,605.5 1704.5,945 1569.5,1080 1540,1080 1515,1080 1485,1080 1420,1080 1415,1075 1415,980 1295,980 1285,970 1285,955 1285,940 1285,920 1285,850 1295,840 1490,840 1490,690 1295,690
+24V on TopLayer "24V_Top" (solid, pour order 43): 3275,365 3264.46,375.54 3245,395 3185,395 3120,395 3110,395 3090,395 3045,395 3035,385 3035,166.08 3045,156.08 3094.95,156.08 3110,156.08 3125,156.08 3246.09,156.08 3275,185 3275,205 3275,220 3275,215 3275,225 3275,245
NetQ2_2 on TopLayer "Q2_2" (solid, pour order 45): 2490,1360 2475,1360 2425,1360 2410,1360 2360,1360 2335,1360 2330,1365 2330,1375 2330,1700 2345,1715 2360,1730 2360,1945 2380,1965 2505,1965 2665,1965 2685,1945 2685,1785 2665,1765 2570,1765 2570,1680 2595,1680 2605,1670 2605,1655 2605,1605 2605,1600 2605,1590 2595,1580 2570,1580 2570,1535 2550,1515 2510,1515 2500,1505 2500,1365 2495,1360
+24V on BottomLayer "+24V" (solid, pour order 18): 2462.5,42.5 2475,30 3140,30 3145,35 3700,35 3795,130 3795,235 3795,267.5 3640,422.5 3627.5,435 3455,435 2475,435 2462.5,422.5 2462.5,335
NetC73_2 on BottomLayer "C73_2" (solid, pour order 12): 1285,1870 1275,1860 1275,1855 1275,1110 1285,1100 1600,1100 1610,1110 1610,1530 1475,1665 1380,1665 1380,1860 1370,1870
+1.8V on BottomLayer "1.8V_Bottom" (solid, pour order 32): 4265,970 4270,975 4350,975 4355,970 4355,805 4355,770 4350,765 4270,765 4265,770
+5V on BottomLayer "+5V" (solid, pour order 34): 4350,450 4490,450 4495,455 4495,470 4500,475 4680,475 4760,555 4760,755 4665,850 4655,860 4635,880 4610,880 4370,880 4365,875 4365,765 4320,720 4305,705 4305,610 4305,565 4305,470 4310,465 4320,455 4325,450
NetD3_1 on BottomLayer "NetD3_1_Bottom" (solid, pour order 40): 2200,525 2210,535 2210,610 2085,735 1990,735 1885,630 1885,500 1895,490 2065,490 2100,525
NetC51_2 on Mid Layer 2 "C51_2" (solid, pour order 0): 1915,450 2220,450 2230,460 2230,900 2220,910 1735,910 1725,900 1725,720 1810,635 1905,540 1905,460
NetC65_1 on Mid Layer 2 "C65_1" (solid, pour order 16): 1275,440 1285,430 1660,430 1670,440 1670,510 1670,530 1675,535 1775,535 1780,540 1780,580 1780,590 1660,710 1660,895 1560,995 1520,1035 1477.5,1077.5 1420,1135 1285,1135 1275,1125 1275,895 1275,850 1275,830
PGND on Mid Layer 1 "PGND" (solid, pour order 20): 1620,30 1640,30 2220,30 2230,40 2230,720 2275,765 2275,875 2240,910 2047.5,910 1902.5,1055 1902.5,1458.75 2073.75,1630 2073.75,1760 1655,1760 1285,1760 1275,1750 1275,350 1285,340 1510,340 1610,240 1610,145 1610,40
GND on Mid Layer 1 "GND_Mid1" (solid, pour order 22): 2337.5,2220 2325,2207.5 2325,2175 2325,2005 2325,1970 2350,1945 2350,1725 2325,1700 2325,1580 2261.86,1516.86 2135,1516.86 2030,1411.86 2030,1335 2030,1105 2105,1030 2230,1030 2295,1030 2395,930 2395,695 2360,660 2360,40.61 2370.3,30.3 4590,30.3 4600.31,40.61 4600.31,255 4732.65,387.35 4825,387.35 4915,387.35 4962.35,387.35 4977.5,402.5 4977.5,1035 4962.35,1050 4325,1050 4290,1085 4290,1310.93 4115,1485.93 4030,1485.93 3950,1485.93 3894.07,1485.93 3882.5,1497.5 3882.5,2207.5 3870,2220 3760,2220 3680,2220 3205,2220 3170,2220 3100,2220 2935,2220 2900,2220 2810,2220 2590,2220 2535,2220 2410,2220
+3.3V on Mid Layer 3 "3.3V" (solid, pour order 36): 4622.5,607.5 4622.5,565 4622.5,525 4622.5,492.5 4622.5,435 4622.5,382.5 4622.5,297.5 4590,265 4590,250 4590,50 4580,40 4570,40 4535,40 4510,40 4490,40 2765,40 2752.5,52.5 2752.5,395 2752.5,747.5 2540,747.5 2420,747.5 2405,935 2300,1040 2230,1040 2207.5,1062.5 2207.5,1487.5 2220,1500 2230,1510 2270,1510 2295,1510 2325,1510 2359.01,1509.91 2380,1510 2445,1510 2476.49,1510.4 2500,1510 2535,1510 2550,1510 2575,1510 2610,1510 2635,1510 2675,1510 2715,1510 2745,1510 2770,1510 2785,1510 2825,1510 2850,1510 2875,1510 2895,1510 2910,1510 2925,1510 2960,1510 2975,1510 2995,1510 3010,1510 3020,1510 3105,1425 3130,1400 3130,1300 3130,1260 3130,1225 3130,1200 3130,1180 3130,1105 3130,1045 3130,855 3159.05,825.95 3285,825.95 3315,795.95 3315,775 3315,615 3420,510 3575,510 3680,510 3690,510 3700,510 3880,510 3890,500 3890,415 3910,395 4100,395 4120,415 4120,435 4120,540 4120,555 4215,650 4230,665 4265,700 4340,775 4595,775 4610,775 4622.5,762.5 4622.5,675
+3.3VNF on Mid Layer 3 "3.3VNF" (solid, pour order 24): 4110,1145 4165,1090 4165,945 4130,910 4050,910 3930,790 3880,790 3770,900 3395,900 3380,915 3380,960 3385,965 3405,965 3455,1015 3740,1015 3765,1040 3765,1105 3765,1120 3765,1195 3765,1210 3765,1225 3765,1310 3775,1320 4100,1320 4110,1310
+1.8V on Mid Layer 3 "1.8V" (solid, pour order 28): 3240,2040 3220,2025 3220,1613.18 3200,1593.18 3019.29,1593.18 3005,1580 3005,1540 3255,1290 3255,1225 3255,1110 3335,1030 3700,1030 3731.67,1030 3745,1043.33 3745,1315 3765,1332.5 4107.5,1332.5 4125,1315 4125,1150 4175,1100 4175,1085 4175,915 4180,910 4250,910 4320,910 4325,915 4325,1040 4285,1080 4285,1120 4285,1160 4285,1185 4285,1210 4285,1265 4285,1295 4285,1310 4115,1480 3910,1480 3855,1480 3820,1515 3720,1615 3720,1630 3720,2025 3705,2040 3660,2040 3610,2040 3595,2040 3530,2040 3340,2040
+1.0V on Mid Layer 3 "1.0V" (solid, pour order 30): 4450,985 4480,985 4515,985 4540,985 4620,985 4625,980 4625,900 4625,815 4625,795 4620,790 4395,790 4330,790 4222.5,682.5 4105,565 4105,470 4105,465 4105,445 4105,420 4095,410 3915,410 3905,420 3905,435 3905,540 3650,795 3335,795 3295,835 3165,835 3145,855 3145,995 3145,1030 3185,1070 3280,1070 3345,1005 3400,1005 3405,1000 3405,980 3400,975 3385,975 3370,960 3370,910 3390,890 3765,890 3875,780 3935,780 4055,900 4420,900 4445,925 4445,970 4445,980
PGND on Mid Layer 4 "PGND_Mid4" (solid, pour order 47): 1620,30 1640,30 2220,30 2230,40 2230,720 2275,765 2275,875 2240,910 2047.5,910 1902.5,1055 1902.5,1458.75 2073.75,1630 2073.75,1760 1655,1760 1285,1760 1275,1750 1275,350 1285,340 1510,340 1610,240 1610,145 1610,40
GND on Mid Layer 4 "GND_Mid4" (solid, pour order 38): 2337.5,2220 2325,2207.5 2325,2175 2325,2005 2325,1970 2350,1945 2350,1710 2325,1685 2325,1580 2261.86,1516.86 2135,1516.86 2030,1411.86 2030,1335 2030,1105 2105,1030 2230,1030 2295,1030 2395,930 2395,695 2360,660 2360,40.61 2370.3,30.3 4590,30.3 4600.31,40.61 4600.31,255 4732.65,387.35 4825,387.35 4915,387.35 4962.35,387.35 4977.5,402.5 4977.5,1035 4962.35,1050 4325,1050 4290,1085 4290,1310 4114.07,1485.93 4030,1485.93 3950,1485.93 3894.07,1485.93 3882.5,1497.5 3882.5,2207.5 3870,2220 3760,2220 3680,2220 3205,2220 3170,2220 3100,2220 2935,2220 2900,2220 2810,2220 2590,2220 2535,2220 2410,2220

## Keep-outs
KeepOutLayer:
  text "KEEPOUT" at 7495,-2915 h75

## Other copper
TopLayer:
  text ".GTL" at 7565,-1035 h50
  text "TOP LAYER" at 7100,-2910 h75
Mid Layer 1:
  text ".G1" at 7565,-1215 h50
  text "MID LAYER 1" at 7105,-2915 h75
Mid Layer 2:
  text ".G2" at 7565,-1385 h50
  text "MID LAYER 2" at 7140,-2915 h75
Mid Layer 3:
  text ".G3" at 7565,-1555 h50
  text "MID LAYER 3" at 7135,-2915 h75
Mid Layer 4:
  text ".G4" at 7565,-1725 h50
  text "MID LAYER 4" at 7120,-2915 h75
BottomLayer:
  text ".GBL" at 7555,-1900 h50
  text "BOTTOM LAYER" at 7150,-2920 h75

## Silkscreen, mask and mechanical layers (free items; w line width, h text height)
TopOverlay:
  text "SWITCHED LOAD" at 4485,1375 h40
  text "RVLT INC." at 4435,1215 h40
  text "rNET POE SENSOR" at 4435,1150 h40
  text "REV A1  9/17" at 4435,1085 h40
  text ".GTO" at 7565,-895 h50
  text "TOP OVERLAY" at 7275,-2915 h75
BottomOverlay:
  text ".GBO" at 7555,-2050 h50
  text "BOTTOM OVERLAY" at 7200,-2920 h125
TopPaste:
  text "TOP PASTE MASK" at 7265,-2915 h75
BottomPaste:
  text "BOTTOM PASTE MASK" at 7115,-2915 h75
TopSolder:
  text ".GTS" at 7565,-965 h50
  text "TOP SOLDERMASK" at 7165,-2920 h75
BottomSolder:
  text ".GBS" at 7555,-1980 h50
  text "BOTTOM SOLDERMASK" at 7135,-2910 h75
DrillGuide:
  text "DRILL GUIDE" at 7375,-2910 h125
Mechanical1:
  the board outline again, w10
Mechanical16:
  rectangle: 6315,-1825 7535,-1755
  region: 7533,-1578 6320,-1578 6320,-1658 7533,-1658
  region: 7533,-1238 6323,-1238 6323,-1318 7533,-1318
  rectangle: 6315,-1135 7535,-1065
  rectangle: 6315,-1485 7535,-1415
  lines w8: 6315,-2020 7525,-2020 ; 6315,-1950 7525,-1950 ; 6315,-1880 7525,-1880 ; 6325,-1705 7535,-1705 ; 6325,-1525 7535,-1525 ; 6325,-1365 7535,-1365 ; 6325,-1185 7535,-1185 ; 6325,-1015 7535,-1015 ; 6325,-945 7535,-945 ; 6325,-875 7535,-875 ; 7830,-875 8130,-875 ; 7840,-2020 8130,-2020 ; 7955,-955 7975,-885 ; 7960,-1940 7980,-2010 ; 7975,-1155 7975,-885 ; 7980,-1780 7980,-2010 ; 7995,-955 7975,-885 ; 8000,-1940 7980,-2010
  lines w10: 4448,-2983 4448,-2103 ; 4448,-2763 8308,-2763 ; 4448,-2543 8308,-2543 ; 4448,-820 4448,-2103 ; 4448,-813 8308,-813 ; 5088,-2983 5088,-2763 ; 6808,-2983 6808,-2763 ; 7868,-2763 7868,-2543 ; 8308,-2103 4448,-2103 ; -2192,-3083 -2192,5017 8408,5017 8408,-3083 -2192,-3083
  lines w30: -2092,-2983 8308,-2983 8308,4917 -2092,4917 -2092,-2983
  text "NOTES:  UNLESS OTHERWISE SPECIFIED" at -1855,4720 h50
  text "A.  ISOLA FR406 OR EQUIVALENT FR4, 6 LAYERS WITH STACK UP AS SHOWN." at -1852,4587 h50
  text "1 OZ. COPPER CLAD (FINISHED) OUTER LAYERS" at -1852,4487 h50
  text "1 OZ. COPPER CLAD (FINISHED) INNER LAYERS" at -1852,4387 h50
  text "OVERALL THICKNESS .062 +/- .004" at -1852,4287 h50
  text "B.  0.0012\" MIN / 0.0015\" MAX COPPER PLATE" at -1840,4130 h50
  text "C.  FINISH IS ENIG" at -1840,3970 h50
  text "D.  FABRICATE BOARDS IN ACCORDANCE WITH IPC-6011/6012" at -1840,3795 h50
  text "E.  SOLDER MASK - LPI,  IPC-840C, COLOR - BLUE" at -1835,3620 h50
  text "F.  SILK SCREEN  - TOP AND BOTTOM SIDES, WHITE, W/ HEAT RESISTANCE EPOXY INK" at -1835,3450 h50
  text "G.  ALL PC BOARDS ARE TO BE 100% TESTED FOR OPENS AND SHORTS PER IPC-652 60V." at -1835,3290 h50
  text "H.  PCB ASSEMBLY IS ROHS COMPLIANT." at -1835,3135 h50
  text "J.  IMPEDANCE CONTROL IS REQUIRED ON THE FOLLOWING NETS." at -1830,3005 h50
  text "PCB SUPPLIER MAY ADJUST TRACE WIDTH/SPACING TO MEET THESE REQUIREMENTS." at -1695,2920 h50
  text "- NETS J1_2 AND J1_3 ARE 90 +/- 5 OHMS DIFFERENTIAL" at -1695,2745 h50
  text "- NETS J2_1 AND J2_2 ARE 100 +/- 5 OHMS DIFFERENTIAL" at -1695,2655 h50
  text "- NETS J2_3 AND J2_6 ARE 100 +/- 5 OHMS DIFFERENTIAL" at -1695,2565 h50
  text "- NETS ETH_TXN AND ETH_TXP ARE 100 +/- 5 OHMS DIFFERENTIAL" at -1695,2475 h50
  text "BOARD OUTLINE FOR 4\" SQUARE WATERPROOF BOX COMMERCIAL ELECTRIC P/N 497014" at 1541,2404 h50
  text "- NETS ETH_RXN AND ETH_RXP ARE 100 +/- 5 OHMS DIFFERENTIAL" at -1695,2385 h50
  text "- NETS EMAC_TX0 AND EMAC_TX1 ARE 100 +/- 5 OHMS DIFFERENTIAL" at -1695,2290 h50
  text "- NETS EMAC_RX0 AND EMAC_RX1 ARE 100 +/- 5 OHMS DIFFERENTIAL" at -1695,2190 h50
  text "- NETS DDR2_SDCK AND DDR2_NSDCK ARE 110 +/-6 OHMS DIFFERENTIAL" at -1695,2085 h50
  text "LAYER STACK" at 6580,-755 h70
  text "DETAILS:" at 4488,-903 h45
  text ".062 +/- .004" at 8010,-1740 h50 r90
  text "TITLE:" at 4488,-2183 h45
  text "RVLT rNET POE SENSOR" at 5435,-2305 h120
  text "PRINTED CIRCUIT ASSEMBLY DRAWING" at 5410,-2465 h80
  text "DWG NO:" at 4497,-2623 h45
  text "REV:" at 7908,-2623 h45
  text "A1" at 8048,-2723 h80
  text "SCALE:" at 4483,-2843 h45
  text "PRINT DATE:" at 5128,-2843 h45
  text "LAYER:" at 6848,-2843 h45
  text "1=1" at 4748,-2923 h80
  text ".Print_Date" at 5808,-2923 h80
DrillDrawing:
  circle w10: c-1620.25,-1054.17 r20
  circle w10: c-1620.25,-1054.17 r33.33
  circle w10: c-1620.25,-2104.17 r33.33
  lines w10: -1653.58,-2370.83 -1586.92,-2370.83 -1620.25,-2437.5 -1653.58,-2370.83 ; -1653.58,-2270.83 -1636.92,-2270.83 -1620.25,-2287.5 -1603.58,-2270.83 -1586.92,-2270.83 -1603.58,-2254.17 -1586.92,-2237.5 -1603.58,-2237.5 -1620.25,-2220.83 -1636.92,-2237.5 -1653.58,-2237.5 -1636.92,-2254.17 -1653.58,-2270.83 ; -1653.58,-1987.5 -1653.58,-1970.83 -1636.92,-1954.17 -1653.58,-1937.5 -1653.58,-1920.83 -1636.92,-1920.83 -1620.25,-1937.5 -1603.58,-1920.83 -1586.92,-1920.83 -1586.92,-1937.5 -1603.58,-1954.17 -1586.92,-1970.83 -1586.92,-1987.5 -1603.58,-1987.5 -1620.25,-1970.83 -1636.92,-1987.5 -1653.58,-1987.5 ; -1653.58,-1837.5 -1586.92,-1837.5 -1586.92,-1770.83 -1653.58,-1770.83 -1653.58,-1837.5 ; -1653.58,-1654.17 -1620.25,-1687.5 -1586.92,-1654.17 -1620.25,-1620.83 -1653.58,-1654.17 ; -1653.58,-1520.83 -1636.92,-1520.83 -1636.92,-1537.5 -1603.58,-1537.5 -1603.58,-1520.83 -1586.92,-1520.83 -1586.92,-1487.5 -1603.58,-1487.5 -1603.58,-1470.83 -1636.92,-1470.83 -1636.92,-1487.5 -1653.58,-1487.5 -1653.58,-1520.83 ; -1653.58,-1320.83 -1586.92,-1320.83 -1620.25,-1387.5 -1653.58,-1320.83 ; -1653.58,-1237.5 -1620.25,-1220.83 -1586.92,-1237.5 -1603.58,-1204.17 -1586.92,-1170.83 -1620.25,-1187.5 -1653.58,-1170.83 -1636.92,-1204.17 -1653.58,-1237.5 ; -1653.58,-937.5 -1586.92,-937.5 -1586.92,-870.83 -1653.58,-870.83 -1653.58,-937.5 ; -1653.58,-770.83 -1636.92,-770.83 -1620.25,-787.5 -1603.58,-770.83 -1586.92,-770.83 -1603.58,-754.17 -1586.92,-737.5 -1603.58,-737.5 -1620.25,-720.83 -1636.92,-737.5 -1653.58,-737.5 -1636.92,-754.17 -1653.58,-770.83 ; -1640.25,-2384.17 -1600.25,-2384.17 -1620.25,-2424.17 -1640.25,-2384.17 ; -1640.25,-924.17 -1600.25,-924.17 -1600.25,-884.17 -1640.25,-884.17 -1640.25,-924.17 ; -1640.25,-764.17 -1630.25,-764.17 -1620.25,-774.17 -1610.25,-764.17 -1600.25,-764.17 -1610.25,-754.17 -1600.25,-744.17 -1610.25,-744.17 -1620.25,-734.17 -1630.25,-744.17 -1640.25,-744.17 -1630.25,-754.17 -1640.25,-764.17
  lines w15: -1713.38,-2482.5 1431.79,-2482.5 ; -1713.38,-682.5 1431.79,-682.5 ; -1162.5,-2632.5 -1162.5,-532.5 ; 183.1,-2632.5 183.1,-532.5 ; 880.92,-2632.5 880.92,-532.5 ; -1713.38,-2632.5 1431.79,-2632.5 1431.79,-532.5 -1713.38,-532.5 -1713.38,-2632.5
  text "Symbol" at -1623.38,-637.5 h72
  text "Finished Hole Size" at -1117.5,-637.5 h72
  text "Hit Count" at 228.1,-637.5 h72
  text "Plated" at 925.92,-637.5 h72
  text "8.00mil (0.203mm)" at -1117.5,-787.5 h60
  text "365" at 228.1,-787.5 h60
  text "PTH" at 925.92,-787.5 h60
  text "12.00mil (0.305mm)" at -1117.5,-937.5 h60
  text "214" at 228.1,-937.5 h60
  text "PTH" at 925.92,-937.5 h60
  text "22.00mil (0.559mm)" at -1117.5,-1087.5 h60
  text "10" at 228.1,-1087.5 h60
  text "PTH" at 925.92,-1087.5 h60
  text "35.00mil (0.889mm)" at -1117.5,-1237.5 h60
  text "8" at 228.1,-1237.5 h60
  text "PTH" at 925.92,-1237.5 h60
  text "39.00mil (0.991mm)" at -1117.5,-1387.5 h60
  text "2" at 228.1,-1387.5 h60
  text "PTH" at 925.92,-1387.5 h60
  text "46.00mil (1.168mm)" at -1117.5,-1537.5 h60
  text "2" at 228.1,-1537.5 h60
  text "PTH" at 925.92,-1537.5 h60
  text "50.00mil (1.270mm)" at -1117.5,-1687.5 h60
  text "4" at 228.1,-1687.5 h60
  text "PTH" at 925.92,-1687.5 h60
  text "60.00mil (1.524mm)" at -1117.5,-1837.5 h60
  text "5" at 228.1,-1837.5 h60
  text "PTH" at 925.92,-1837.5 h60
  text "62.00mil (1.575mm)" at -1117.5,-1987.5 h60
  text "2" at 228.1,-1987.5 h60
  text "PTH" at 925.92,-1987.5 h60
  text "65.00mil (1.651mm)" at -1117.5,-2137.5 h60
  text "2" at 228.1,-2137.5 h60
  text "PTH" at 925.92,-2137.5 h60
  text "128.00mil (3.251mm)" at -1117.5,-2287.5 h60
  text "2" at 228.1,-2287.5 h60
  text "PTH" at 925.92,-2287.5 h60
  text "130.00mil (3.302mm)" at -1117.5,-2437.5 h60
  text "4" at 228.1,-2437.5 h60
  text "PTH" at 925.92,-2437.5 h60
  text "620 Total" at 228.1,-2587.5 h60
  text "DRILL DRAWING" at 7220,-2910 h125

## Dimensions
6275,-1795 to 5955,-1795 on Mechanical16
6285,-1525 to 5965,-1525 on Mechanical16
6285,-1705 to 5965,-1705 on Mechanical16
6285,-1615 to 5965,-1615 on Mechanical16
6285,-1015 to 5965,-1015 on Mechanical16
6285,-945 to 5965,-945 on Mechanical16
6285,-875 to 5965,-875 on Mechanical16
6285,-1275 to 5965,-1275 on Mechanical16
6285,-1365 to 5965,-1365 on Mechanical16
6285,-1185 to 5965,-1185 on Mechanical16
6275,-1105 to 5955,-1105 on Mechanical16
6285,-1445 to 5965,-1445 on Mechanical16
6275,-2020 to 5955,-2020 on Mechanical16
6275,-1950 to 5955,-1950 on Mechanical16
6275,-1880 to 5955,-1880 on Mechanical16
1215,0 to 1220,2250 on Mechanical16
1250,-30 to 5000,-50 on Mechanical16